# EAGLE board Copy of Brave Leelo-Wluff (EAGLE 9.7.0)

Size 195.62 x 125.34 mm. Coordinates in mm from the lower left corner, seen from the top.
Outline: 0,0 195.62,0 195.62,125.34 0,125.34 0,0
Copper layers (1*16): Top 0.035mm / dielectric 1.5mm / Bottom 0.035mm
Design rules "default": minimum track width 6mil, minimum drill 0.35mm, track to track 6mil, track to pad 6mil, pad to pad 6mil, via to via 6mil, smd to smd 6mil, copper to edge 40mil, drill to drill 6mil, minimum pad ring 10mil, minimum via ring 8mil, stop-mask expansion 4mil, vias tented up to drill 0mil, thermal gap 10mil

## Footprints (pad centres in the part's own frame; a part is rotated, then mirrored left to right if it is on the bottom)
LEDRD254W60D565H860B = drill 0.981 pad 1.581: 1 -1.27,0; 2 1.27,0
MOTOR = drill 1.118 pad 3.15 octagon: + 2.54,0; - -2.54,0
BATTERY-GENERIC = drill 1.118 pad 3.15 octagon: + 2.54,0; - -2.54,0
RESAD1016W63L850D250B = drill 0.83 pad 1.43: 1 -5.08,0; 2 5.08,0
SWITCH-SPDT-PTH-8.5X3.7MM = drill 1.016 pad 1.88: 1 -2.54,0; 2 0,0; 3 2.54,0
SWITCH-MOMENTARY-PTH-6.5MM = drill 1.016 pad 1.88: 1 -3.251,2.261; 2 3.251,2.261; 3 -3.251,-2.261; 4 3.251,-2.261
DIP762W53P254L1969H508Q16B = drill 0.743 pad 1.343: 1 -3.81,8.89; 2 -3.81,6.35; 3 -3.81,3.81; 4 -3.81,1.27; 5 -3.81,-1.27; 6 -3.81,-3.81; 7 -3.81,-6.35; 8 -3.81,-8.89; 9 3.81,-8.89; 10 3.81,-6.35; 11 3.81,-3.81; 12 3.81,-1.27; 13 3.81,1.27; 14 3.81,3.81; 15 3.81,6.35; 16 3.81,8.89

## Placement (x,y rotation side)
D1  RED  [LEDRD254W60D565H860B]  141.18,29.29 0 top
D2  RED  [LEDRD254W60D565H860B]  133.56,29.29 0 top
D3  RED  [LEDRD254W60D565H860B]  148.8,29.29 0 top
D4  RED  [LEDRD254W60D565H860B]  156.42,29.29 0 top
M1  MOTOR_HDR  [MOTOR]  187.36,101.96 0 top
M2  MOTOR_HDR  [MOTOR]  44.82,117.08 0 top
P1  BATTERYGENERIC  [BATTERY-GENERIC]  8.26,88.97 180 top
R1  1k  [RESAD1016W63L850D250B]  25.61,8.97 90 top
R2  1k  [RESAD1016W63L850D250B]  40.85,8.97 90 top
R3  1k  [RESAD1016W63L850D250B]  56.09,8.97 90 top
R4  1k  [RESAD1016W63L850D250B]  71.33,8.97 90 top
R5  560  [RESAD1016W63L850D250B]  132.29,41.99 90 top
R6  560  [RESAD1016W63L850D250B]  139.91,41.99 90 top
R7  560  [RESAD1016W63L850D250B]  147.53,41.99 90 top
R8  560  [RESAD1016W63L850D250B]  155.15,41.99 90 top
R9  1k  [RESAD1016W63L850D250B]  124.67,8.97 90 top
S1  TOGGLE  [SWITCH-SPDT-PTH-8.5X3.7MM]  25.61,21.67 0 top
S2  TOGGLE  [SWITCH-SPDT-PTH-8.5X3.7MM]  40.85,21.67 0 top
S3  TOGGLE  [SWITCH-SPDT-PTH-8.5X3.7MM]  56.09,21.67 0 top
S4  TOGGLE  [SWITCH-SPDT-PTH-8.5X3.7MM]  71.33,21.67 0 top
S5  SWITCH_MOMENTARY  [SWITCH-MOMENTARY-PTH-6.5MM]  122.13,25.48 90 top
U1  74HC75_PDIP  [DIP762W53P254L1969H508Q16B]  92.92,25.48 90 top
U2  L293E  [DIP762W53P254L1969H508Q16B]  108.03,97.54 90 top

## Library data of the parts
D1-D4 = Tinkercad; CATEGORY: Opto-Electronic; SUB-CATEGORY: LED; VALUE: LED_RED
M1 M2 P1 R1-R9 S1-S5 U1 U2 = Tinkercad

## Nets
D1_A: D1.1 R6.1
D2_A: D2.1 R5.1
D3_A: D3.1 R7.1
D4_A: D4.1 R8.1
M1_+: M1.+ U2.6
M1_-: M1.- U2.3
M2_+: M2.+ U2.11
M2_-: M2.- U2.14
P1+: P1.+ R5.2 R6.2 R7.2 R8.2 S1.3 S2.3 S3.3 S4.3 S5.1 S5.2 U1.5 U2.1 U2.8 U2.9 U2.16
P1-: P1.- R1.1 R2.1 R3.1 R4.1 R9.1 U1.12 U2.4 U2.5 U2.12 U2.13
U1_1!Q: D2.2 U1.1 U2.2
U1_4!Q: D4.2 U1.8 U2.10
U1_D1: R1.2 S1.2 U1.2
U1_D2: R2.2 S2.2 U1.3
U1_D3: R3.2 S3.2 U1.6
U1_D4: R4.2 S4.2 U1.7
U1_LE12: R9.2 S5.3 S5.4 U1.4 U1.13
U2_2A: D1.2 U1.14 U2.7
U2_4A: D3.2 U1.11 U2.15

## Tracks (layer width: path | path; a pad name or v marks a point on that pad's centre or on a via)
D1_A  (1 unrouted)
D2_A  (1 unrouted)
D3_A  (1 unrouted)
D4_A  (1 unrouted)
M1_+  (1 unrouted)
M1_-  (1 unrouted)
M2_+  (1 unrouted)
M2_-  (1 unrouted)
P1+  (15 unrouted)
P1-  (10 unrouted)
U1_1!Q  (2 unrouted)
U1_4!Q  (2 unrouted)
U1_D1  (2 unrouted)
U1_D2  (2 unrouted)
U1_D3  (2 unrouted)
U1_D4  (2 unrouted)
U1_LE12  (4 unrouted)
U2_2A  (2 unrouted)
U2_4A  (2 unrouted)